# Altium PCB PCB1.PcbDoc
Units mm, origin at the board's own origin, x right, y up, seen from the top; angles counter-clockwise.
Board outline 152.4 x 101.6 mm, 2 copper layers (Top Layer, Bottom Layer); 44 components, 49 nets, 190 pads, 0 vias.
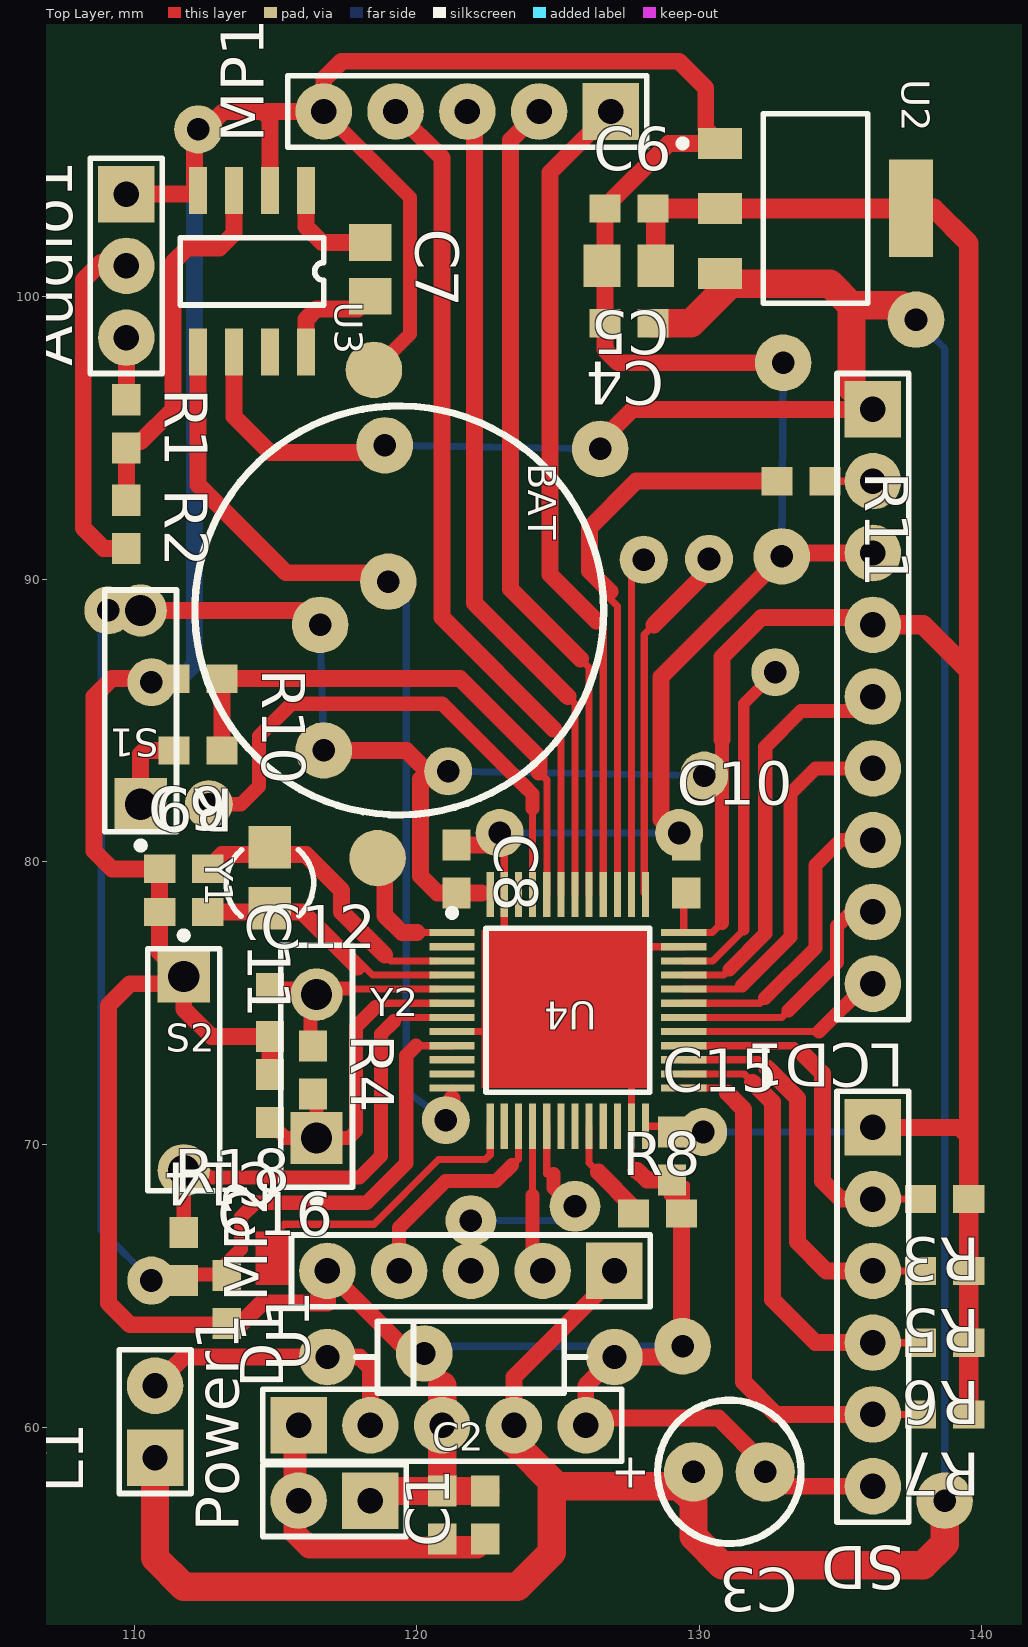
[diagram p0: Top Layer view]
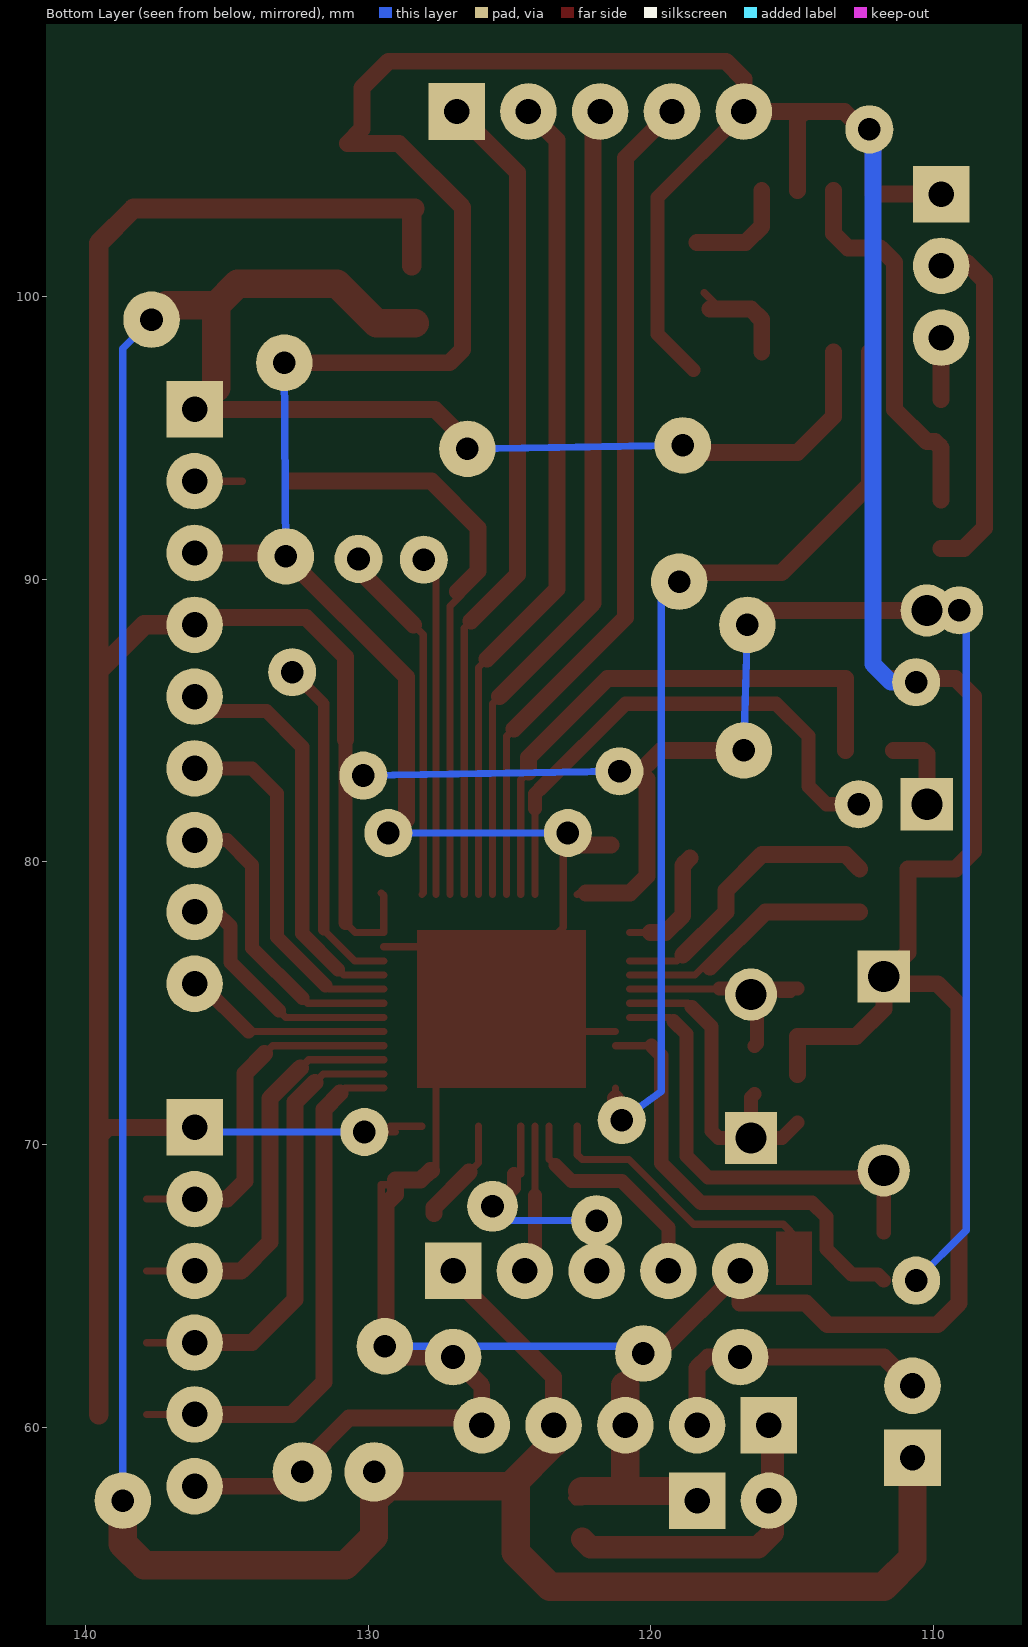
[diagram p1: Bottom Layer view, seen from below]

## Layer stack, top to bottom
Top Layer: signal copper 0.0356
Dielectric: dielectric 0.32, FR-4, Dk 4.8
Bottom Layer: signal copper 0.0356

## Board outline
25.4,25.4 177.8,25.4 177.8,127 25.4,127

## Design rules (kind name [scope] priority, off if disabled: settings)
Clearance [All] p1: gap=0.127
PolygonConnect [All] p1: connectstyle=Relief reliefconductorwidth=0.254 reliefentries=4 polygonreliefangle="90 Angle"
RoomDefinition Sheet1 [InComponentClass('Sheet1')] p1: confinementstyle=ConfineIn formatcopy=TRUE lockcomponents=FALSE outline 178.943,24.384 191.008,24.384 191.008,35.052 178.943,35.052
RoutingVias [All] p1: holewidth=0.711 width=1.27 viastyle="Through Hole" minholewidth=0.711 minwidth=1.27 maxholewidth=0.711 maxwidth=1.27
SilkscreenOverComponentPads [All] p1: minsilkscreentomaskgap=0.254
SolderMaskExpansion [All] p1: expansion=0.102
TestPointUsage [All] p1: valid=0 allowmultiple=FALSE
Testpoint [All] p1: side=15 testpointundercomponent=TRUE minsize=1.016 maxsize=2.54 preferedsize=1.524 minholesize=0 maxholesize=1.016 preferedholesize=0.813 testpointgrid=0.025 style=1023 order=0-112345678
Width [All] p1: maxlimit=1 minlimit=0.254 preferedwidth=0.254 minimp=50.000000 maximp=50.000000 favimp=50.000000
23 further rules are at their usual default settings.

## Components (designator, comment, footprint, x,y, rotation, side; value= is the part's Value field where it differs from the comment)
Audio1 "Header 3" HDR1X3 109.728,103.632 r270 top
BAT "UPS" BAT 119.38,88.9 r180 top
C1 "104" 1608[0603] 122.428,56.896 r90 top
C2 "104" 1608[0603] 120.904,56.896 r90 top (schematic designator C16)
C3 "470uF" RB.1/.2 131.064,58.42 r180 top (schematic designator C26)
C4 "104" 1608[0603] 127.508,99.06 r180 top
C5 "10uF" 2012[0805] 127.508,101.092 r180 top
C6 "104" 1608[0603] 127.508,103.124 r0 top
C7 "" 2012[0805] 118.364,100.965 r270 top
C8 "" 1608[0603] 121.412,79.756 r270 top
C9 "" 1608[0603] 111.76,79.756 r0 top
C10 "" 1608[0603] 129.54,79.756 r90 top
C11 "" 1608[0603] 111.76,78.232 r0 top
C12 "" 1608[0603] 114.808,74.676 r90 top
C14 "" 1608[0603] 114.808,71.628 r270 top
C15 "" 1608[0603] 129.032,69.596 r90 top
C16 "" 1608[0603] 113.284,64.516 r90 top
D1 "IN4937" DIODE-0.4 121.92,62.484 r180 top
L1 "100uH" HDR1X2 110.744,58.928 r90 top
LCD1 "LCD13164" HDR1X9 136.144,96.012 r270 top
MP1 "Header 5" HDR1X5 126.873,106.553 r180 top
MP2 "Header 5" HDR1X5 127,65.532 r180 top
Power1 "Header 2" HDR1X2 118.364,57.404 r180 top
R1 "100K" 1608[0603] 109.728,95.504 r270 top
R2 "100K" 1608[0603] 109.728,91.948 r270 top
R3 "45K" 1608[0603] 138.684,68.072 r180 top
R4 "1M" 1608[0603] 116.332,72.644 r270 top
R5 "45K" 1608[0603] 138.684,65.532 r180 top
R6 "45K" 1608[0603] 138.684,62.992 r180 top
R7 "45K" 1608[0603] 138.684,60.452 r180 top
R8 "10K" 1608[0603] 128.524,67.564 r0 top
R9 "10K" 1608[0603] 112.268,83.947 r180 top
R10 "1M" 1608[0603] 112.268,86.487 r0 top
R11 "45K" 1608[0603] 133.604,93.472 r0 top
R18 "10K" 1608[0603] 111.76,66.04 r90 top
S1 "SW-PB" SPST-2#1 110.236,85.344 r90 top
S2 "SW-PB" SPST-2#1 111.76,72.644 r270 top (schematic designator S1)
SD "Header 6" HDR1X6 136.144,70.612 r270 top
U1 "LM2576S5.0" HDR1X5 115.824,60.071 r0 top (schematic designator U7)
U2 "REG1117-2.5" ZZ311 134.112,103.124 r270 top (schematic designator U6)
U3 "LM386M-1" "SOP-8 - duplicate" 116.078,98.044 r90 bottom (schematic designator U2)
U4 "STM32F103C8T6" mTQFP48 125.476,76.2 r0 top (schematic designator U6)
Y1 "32.768K" BCY-W2/D3.1 114.808,79.248 r180 top
Y2 "8MHz" SPST-2#2 116.459,72.771 r90 top

## Footprints (in the part's own frame and the unit in brackets; to place one, negate y for a bottom-side part, rotate by r counter-clockwise, add the part's x,y. Pads: shape width x height; smd on the part's side, far side on the other; paste and mask are expansions set on the pad)
1608[0603] [mm] "Chip Capacitor; Body 1.6 x 0.8 mm (LxW typ)"
  rect 1.1x1 smd: 1(-0.85,0) 2(0.85,0)
2012[0805] [mm] "Chip Resistor; Body 2.0 x 1.3 mm (LxW typ)"
  rect 1.3x1.5 smd: 1(-0.95,0) 2(0.95,0)
BAT [mm]
  round 2 smd: 1(0.762,8.763) 2(0.889,-8.509)
  silkscreen extent -7.24,-7.23 7.23,7.23
BCY-W2/D3.1 [mm] "Crystal, Thru-Hole; 2 Leads; Body 3.1 x 8.2 mm (Dia.xH)"
  rect 1.5x1.5 smd: 1(0,0.889) 2(0,-1.27)
  silkscreen extent -1.55,-1.19 1.55,1.17
DIODE-0.4 [mm] "Tunnel Diode - Dependent Source Model; 2 Leads"
  round 2 hole 0.85: 1(-5.08,0) 2(5.08,0)
  silkscreen extent -4.06,-1.27 4.06,1.27
HDR1X2 [mm] "Connector; Header; 2 Position"
  rect 2x2 hole 0.9: 1(0,0)
  round 2 hole 0.9: 2(2.54,0)
  silkscreen extent -1.27,-1.27 3.81,1.27
HDR1X3 [mm] "Connector; Header; 3 Position"
  rect 2x2 hole 0.9: 1(0,0)
  round 2 hole 0.9: 2(2.54,0) 3(5.08,0)
  silkscreen extent -1.27,-1.27 6.35,1.27
HDR1X5 [mm] "Connector; Header; 5 Position"
  rect 2x2 hole 0.9: 1(0,0)
  round 2 hole 0.9: 2(2.54,0) 3(5.08,0) 4(7.62,0) 5(10.16,0)
  silkscreen extent -1.27,-1.27 11.43,1.27
HDR1X6 [mm] "Connector; Header; 6 Position"
  rect 2x2 hole 0.9: 1(0,0)
  round 2 hole 0.9: 2(2.54,0) 3(5.08,0) 4(7.62,0) 5(10.16,0) 6(12.7,0)
  silkscreen extent -1.27,-1.27 13.97,1.27
HDR1X9 [mm] "Connector; Header; 9 Position"
  rect 2x2 hole 0.9: 1(0,0)
  round 2 hole 0.9: 2(2.54,0) 3(5.08,0) 4(7.62,0) 5(10.16,0) 6(12.7,0) 7(15.24,0) 8(17.78,0) 9(20.32,0)
  silkscreen extent -1.27,-1.27 21.59,1.27
mTQFP48 [mm] "5.8mm"
  rect 1.6x0.254 smd: 1(-4.223,1.3) 2(-4.223,0.8) 3(-4.223,0.3) 4(-4.223,-0.2) 5(-4.223,-0.7) 6(-4.223,-1.2) 7(-4.223,-1.7) 8(-4.223,-2.2) 9(-4.223,-2.7) 10(-4.223,-3.2) 11(-4.223,-3.7) 12(-4.223,-4.2) 25(3.977,-4.2) 26(3.977,-3.7) 27(3.977,-3.2) 28(3.977,-2.7) 29(3.977,-2.2) 30(3.977,-1.7) 31(3.977,-1.2) 32(3.977,-0.7) 33(3.977,-0.2) 34(3.977,0.3) 35(3.977,0.8) 36(3.977,1.3)
  rect 0.254x1.6 smd: 13(-2.873,-5.55) 14(-2.373,-5.55) 15(-1.873,-5.55) 16(-1.373,-5.55) 17(-0.873,-5.55) 18(-0.373,-5.55) 19(0.127,-5.55) 20(0.627,-5.55) 21(1.127,-5.55) 22(1.627,-5.55) 23(2.127,-5.55) 24(2.627,-5.55) 37(2.627,2.65) 38(2.127,2.65) 39(1.627,2.65) 40(1.127,2.65) 41(0.627,2.65) 42(0.127,2.65) 43(-0.373,2.65) 44(-0.873,2.65) 45(-1.373,2.65) 46(-1.873,2.65) 47(-2.373,2.65) 48(-2.873,2.65)
  silkscreen extent -4.35,-4.35 2.78,2.12
RB.1/.2 [mm]
  round 2.1 hole 0.8: 1(1.27,0) 2(-1.27,0)
  silkscreen extent -2.54,-2.54 2.54,2.54
"SOP-8 - duplicate" [mil] "SOP-8"
  rect 65x25 smd far side: 1(225,0) 2(225,-50) 3(225,-100) 4(225,-150) 5(0,-150) 6(0,-100) 7(0,-50) 8(0,0)
SPST-2#1 [mm] "Circuit Breaker; 2 Leads"
  rect 1.85x1.85 hole 1.1: 1(-3.302,0)
  round 1.85 hole 1.1: 2(3.556,0)
  silkscreen extent -4.89,-1.27 4.28,1.27
SPST-2#2 [mm] "Circuit Breaker; 2 Leads"
  rect 1.85x1.85 hole 1.1: 1(-2.54,0)
  round 1.85 hole 1.1: 2(2.54,0)
  silkscreen extent -4.89,-1.27 4.28,1.27
ZZ311 [mm] "SOT-223/SC-73; 4 Leads; Body 6.7 x 7.3 mm, inc. leads (LxW max)"
  rect 1.1x1.55 smd: 1(-2.3,-3.375) 2(0,-3.375) 3(2.3,-3.375)
  rect 3.45x1.55 smd: 4(0,3.375)
  silkscreen extent -3.35,-4.82 3.35,1.85

## Part data
Audio1: "Header, 3-Pin"
C1 C2 C4 C5 C6 C8 C9 C10 C11 C12 C14 C15 C16: library part Cap, "Capacitor"
C3: library part "CAPACITOR POL", "Capacitor"
C7: library part "Cap Pol1", "Polarized Capacitor (Radial)"
D1: library part "Diode 1N4007", "1 Amp General Purpose Rectifier"
L1: library part INDUCTOR2
MP1 MP2: "Header, 5-Pin"
Power1: "Header, 2-Pin"
R1 R2 R3 R4 R5 R6 R7 R8 R9 R10 R11 R18: library part Res2, "Resistor"
S1 S2: "Switch"
SD: "Header, 6-Pin"
U1: "Simple Switcher 3A Step Down Voltage Regulator"
U2: library part REG1117-3.3, "800mA and 1A Low Dropout Positive Regulator 2.85V, 3.3V, 5V, and Adjustable"
U3: library part TDA2822
U4: library part VS1003
Y1 Y2: library part XTAL, "Crystal Oscillator"

## Free pads (board coordinates)
  round 1.8 hole 0.8: 0(121.92,67.31) 1(125.603,67.818)
  round 2 hole 0.8: 3(118.872,94.742) 4(126.492,94.615) 5(118.999,89.916) 7(138.684,57.404) 8(137.668,99.187) 9(116.713,83.947) 10(116.586,88.392) 11(120.269,62.611) 12(129.413,62.865) 13(132.969,97.663) 14(132.918,90.813)
  round 1.7 hole 0.8: 6(121.031,70.866) 15(130.136,70.446) 16(110.617,65.19) 17(109.093,88.9) 18(121.112,83.208) 19(130.175,83.058) 20(122.936,81.026) 21(129.286,81.026) 22(110.617,86.36) 23(112.268,105.918) 24(132.691,86.717) 25(130.345,90.721) 26(128.035,90.697) 27(112.649,82.042)

## Nets (pads, with @x,y where several pads share a name; then routed paths per layer and width w, separated by ;. In a path a pad name is that pad's centre, name@x,y a point inside that pad or via, vN(x,y) a via of type N, cw(c..) or ccw(c..) an arc to the next point about the centre after c; other vN are vias at no path point)
5V: C3.1 C4.1 L1.1 LCD1.1 MP2.1 pad.3 pad.4 pad.7 pad.8 U1.4 U2.3 U3.6 | length 133.1
  Top Layer w0.254: LCD1.1@135.382,96.012 LCD1.1@135.382,96.774 ; LCD1.1@135.636,96.52 LCD1.1
  Top Layer w0.6: U3.6 113.538,95.758 114.808,94.488 118.872,94.488 pad.3 ; U1.4 123.444,61.782 127,65.338 MP2.1 ; pad.4 127,95.377 127.635,96.012 135.382,96.012 LCD1.1
  Top Layer w1: L1.1 110.744,55.372 111.76,54.356 123.571,54.356 124.782,55.567 124.782,58.098 ; U1.4 123.444,59.436 124.968,57.912 129.286,57.912 C3.1@129.794,57.404 ; C4.1 129.707,99.06 131.104,100.457 134.62,100.457 135.382,99.695 ; C3.1 129.794,56.134 130.81,55.118 137.922,55.118 138.684,55.88 pad.7 ; LCD1.1@135.382,96.774 135.382,99.695 ; pad.8 137.16,99.695 135.382,99.695
  Bottom Layer w0.254: pad.3 pad.4 ; pad.8@137.16,99.187 pad.8 138.684,98.171 pad.7
15V: C1.1 C2.1 Power1.2 U1.1 | length 11.1
  Top Layer w0.254: Power1.2@115.697,56.642 Power1.2@115.824,56.515
  Top Layer w0.8: U1.1 115.697,59.944 115.697,56.642 115.697,56.261 116.205,55.753 122.135,55.753 C1.1
BOOT0: R9.1 R10.2 U4.44 | length 19.9
  Top Layer w0.254: 124.331,83.187 124.607,82.911 124.607,78.854 U4.44
  Top Layer w0.6: R9.1 R10.2 121.539,86.487 124.331,83.695 124.331,83.187
DGND: Audio1.1 BAT.2 C1.2 C2.2 C3.2 C4.2 C5.2 C6.1 C8.1 C9.1 C10.2 C11.1 C12.1 C14.1 C15.1 C16.1 D1.1 LCD1.3 MP1.5 MP2.5 pad.11 pad.12 pad.13 pad.14 pad.20 pad.21 pad.22 pad.23 Power1.1 R8.2 R10.1 S2.1 SD.6 U1.3 U1.5 U2.1 U3.2 U3.4 U4.8 U4.23 U4.35 U4.47 | length 254.5
  Top Layer w0.254: Power1.1@118.977,57.509 C2.2@120.667,57.509 ; pad.11@120.269,62.103 120.904,61.468 ; U4.8 122.936,74 ; C1.2@122.428,57.365 122.682,57.365 C1.2@122.809,57.492 ; pad.20@123.317,81.407 123.317,80.899 123.024,80.606 122.721,80.606 123.103,80.224 U4.47 123.103,77.684 123.787,77 ; 123.787,76.289 123.787,77 ; 127.285,73.375 127.603,73.057 U4.23 127.603,69.247 127.762,69.088 128.27,68.58 129.032,68.58 129.54,68.58 129.54,67.73 R8.2 129.374,63.207 128.651,62.484 D1.1 125.984,61.468 U1.5 126.238,60.325 130.429,60.325 C3.2 132.842,57.912 SD.6 ; U4.35 123.787,77
  Top Layer w0.5: MP1.5 119.761,103.505 119.761,98.679 BAT.2
  Top Layer w0.6: Audio1.1 112.141,103.632 112.141,105.537 113.157,106.553 114.554,106.553 ; R10.1 109.22,86.487 108.585,85.852 108.585,80.391 109.22,79.756 C9.1 C11.1 110.91,76.796 S2.1 111.76,74.803 112.737,73.826 C12.1 C14.1 ; S2.1@111.506,75.692 109.855,75.692 109.093,74.93 109.093,64.389 109.855,63.627 113.753,63.627 114.3,64.174 114.515,64.389 116.84,64.389 MP2.5 119.761,62.611 pad.11 ; U3.2 114.808,106.299 114.554,106.553 ; C8.1 122.516,80.606 pad.20 ; 127.762,69.088 127.804,69.088 128.146,68.746 C15.1 129.032,68.58 129.032,68.238 129.374,67.896 129.374,62.904 pad.12 129.032,62.484 D1.1 125.984,61.468 U1.5 126.238,60.325 130.683,60.325 133.096,57.912 SD.6 ; C10.2 128.651,81.495 128.651,86.545 pad.14 133.038,90.932 LCD1.3 ; pad.13 131.064,97.663 127.127,97.663 126.658,98.132 C4.2 C6.1 126.658,103.163 128.919,105.424 U2.1 130.229,105.932 130.229,107.388 129.286,108.331 117.348,108.331 116.713,107.696 MP1.5 114.554,106.553
  Top Layer w1: Power1.1 118.706,57.746 C2.2 ; 120.904,61.468 U1.3 C2.2 ; C1.2 C2.2 ; 122.936,74 123.698,74 ; 124.333,74 123.698,74 ; 127.285,73.375 127.285,76.231 127.635,76.581 124.079,76.581 123.787,76.289 123.698,76.2 123.698,74
  Bottom Layer w0.254: pad.11 120.523,62.865 pad.12 ; pad.20 pad.21 ; pad.14 pad.13
  Bottom Layer w0.6: pad.22 111.506,86.36 112.141,86.995 112.141,105.791 pad.23
LCDCS: LCD1.7 U4.31 | length 10.8
  Top Layer w0.254: U4.31 132.15,75 132.331,75.181
  Top Layer w0.5: 132.331,75.181 134.112,76.962 134.112,79.883 135.001,80.772 LCD1.7
LCDRS: LCD1.6 U4.32 | length 12.9
  Top Layer w0.254: U4.32 131.38,75.5 131.508,75.629
  Top Layer w0.5: 131.508,75.629 133.223,77.343 133.223,82.423 134.112,83.312 LCD1.6
LCDRST: LCD1.5 U4.33 | length 14.6
  Top Layer w0.254: U4.33 130.864,76 131.064,76.2
  Top Layer w0.5: 131.064,76.2 132.334,77.47 132.334,84.074 133.604,85.344 135.636,85.344 LCD1.5
LCDSCK: LCD1.8 U4.30 | length 9
  Top Layer w0.254: U4.30 132.92,74.5 133.16,74.739
  Top Layer w0.5: 133.16,74.739 134.874,76.454 134.874,77.724 135.382,78.232 LCD1.8
LCDSDA: LCD1.9 U4.29 | length 7.4
  Top Layer w0.254: U4.29 134.239,74
  Top Layer w0.5: 134.239,74 135.931,75.692 LCD1.9
MP3_DREQ: MP1.2 U4.41 | length 29.3
  Top Layer w0.254: 125.793,87.185 126.103,86.876 U4.41
  Top Layer w0.6: MP1.2 123.317,105.537 123.317,89.662 125.793,87.185
MP3_MISO: MP2.2 U4.16 | length 5.3
  Top Layer w0.254: 124.103,68.199 124.103,68.494 124.099,68.498 124.099,70.646 U4.16
  Top Layer w0.5: 124.103,68.199 124.103,66.294 124.46,65.937 MP2.2
MP3_MOSI: MP2.3 pad.0 pad.1 U4.17 | length 8.9
  Top Layer w0.254: MP2.3 pad.0 ; 124.603,68.961 U4.17
  Top Layer w0.5: 124.841,68.961 124.841,68.469 125.492,67.818 pad.1
  Bottom Layer w0.254: pad.0 125.095,67.31 pad.1
MP3_RST: MP1.1 U4.40 | length 29.4
  Top Layer w0.254: 126.363,88.521 126.603,88.281 U4.40
  Top Layer w0.6: 126.363,88.521 124.714,90.17 124.714,104.394 MP1.1
MP3_SCLK: MP2.4 U4.15 | length 7.9
  Top Layer w0.254: 123.38,69.278 123.571,69.469 ; 123.603,69.469 U4.15
  Top Layer w0.5: MP2.4 119.38,67.056 121.031,68.707 122.809,68.707 123.38,69.278
MP3_XCS: MP1.4 U4.43 | length 30.1
  Top Layer w0.254: 124.841,84.709 125.103,84.447 U4.43
  Top Layer w0.6: MP1.4 120.904,104.902 120.904,88.646 124.841,84.709
MP3_XDCS: MP1.3 U4.42 | length 29.3
  Top Layer w0.254: 125.349,85.852 125.603,85.598 U4.42
  Top Layer w0.6: MP1.3 122.047,106.299 122.047,89.154 125.349,85.852
NetAudio1_2: Audio1.2 R2.2 | length 12.4
  Top Layer w0.6: R2.2 108.927,91.098 108.204,91.821 108.204,100.584 108.839,101.219 109.601,101.219 Audio1.2
NetAudio1_3: Audio1.3 R1.1 | length 2.2
  Top Layer w0.6: R1.1 Audio1.3
NetC7_1: C7.1 U3.1 | length 3.8
  Top Layer w0.6: U3.1 116.078,102.489 116.652,101.915 C7.1
NetC7_2: C7.2 U3.8 | length 3.7
  Top Layer w0.254: C7.2@117.727,99.758 C7.2@118.11,100.142
  Top Layer w0.6: U3.8 116.078,99.187 116.459,99.568 C7.2@117.917,99.568
NetC9_2: C9.2 U4.3 Y1.2 | length 10.4
  Top Layer w0.254: 118.872,76.708 119.08,76.5 U4.3@120.745,76.5
  Top Layer w0.6: C9.2 113.118,80.264 116.078,80.264 117.348,78.994 117.348,78.232 118.872,76.708
NetC11_2: C11.2 U4.4 Y1.1 | length 9.2
  Top Layer w0.254: C11.2 C11.2@112.737,78.359 ; 118.031,76.406 118.437,76 U4.4@120.745,76
  Top Layer w0.6: C11.2 115.951,78.232 117.904,76.279
NetC12_2: C12.2 R4.1 U4.5 Y2.2 | length 8.5
  Top Layer w0.254: C12.2 115.023,75.311 115.443,75.311 ; 117.576,75.5 U4.5@120.745,75.5
  Top Layer w0.5: C12.2 117.576,75.526 ; Y2.2@116.244,75.311 116.244,73.582 R4.1
NetC14_2: C14.2 R4.2 U4.6 Y2.1 | length 11.9
  Top Layer w0.254: 118.554,74.867 118.688,75 U4.6@120.745,75
  Top Layer w0.5: C14.2 115.355,70.231 Y2.1 ; R4.2 116.459,71.667 Y2.1 ; 118.554,74.867 117.856,74.168 117.856,70.485 117.602,70.231 Y2.1
NetD1_2: D1.2 L1.2 U1.2 | length 10.2
  Top Layer w0.6: L1.2 111.76,62.484 D1.2 117.983,62.484 118.364,62.103 U1.2
NetLCD1_2: LCD1.2 R11.2 | length 1.7
  Top Layer w0.254: R11.2 LCD1.2
NetR1_2: R1.2 R2.1 U3.3 | length 13.4
  Top Layer w0.6: R2.1 R1.2 109.943,94.869 110.236,94.869 111.379,96.012 111.379,101.219 111.887,101.727 113.03,101.727 113.538,102.235 U3.3
NetR8_1: R8.1 U4.20 | length 3.7
  Top Layer w0.254: U4.20 126.103,69.35 126.428,69.025
  Top Layer w0.6: 126.428,69.025 127.674,67.779 R8.1
NetR9_2: R9.2 S1.1 | length 3
  Top Layer w0.6: S1.1 110.236,83.82 110.363,83.947 R9.2
PA0: U4.10
PA1: U4.11
PA2: pad.5 pad.6 U3.5 U4.12 | length 34.9
  Top Layer w0.254: pad.6@121.253,71.628 U4.12
  Top Layer w0.6: U3.5 112.268,93.345 115.379,90.233 118.681,90.233 pad.5 ; pad.6 121.253,70.453 pad.6@121.253,71.628
  Bottom Layer w0.254: pad.5 119.634,89.281 119.634,71.882 pad.6
PA3: U4.13 | length 11
  Top Layer w0.254: 114.808,65.659 114.808,66.675 115.316,67.183 118.491,67.183 120.777,69.469 122.428,69.469 122.603,69.644 U4.13
PA4: U4.14
PA13: pad.24 U4.34 | length 12.7
  Top Layer w0.254: U4.34 130.475,76.5 131.572,77.597
  Top Layer w0.4: 131.572,77.597 131.572,85.598 pad.24@133.096,87.122
PA14: pad.25 U4.37 | length 13.2
  Top Layer w0.254: U4.37 128.055,78.898 128.055,88.05 128.397,88.392 ; pad.25 pad.25@130.619,90.995
  Top Layer w0.6: 128.397,88.392 130.345,90.34 pad.25
PA15: pad.26 U4.38 | length 12.5
  Top Layer w0.254: U4.38 127.603,90.265 pad.26@128.397,91.059
PB3: R11.1 U4.39 | length 20.6
  Top Layer w0.254: 126.712,89.442 127.103,89.051 U4.39
  Top Layer w0.6: 126.839,89.569 126.111,90.297 126.111,91.821 127.762,93.472 R11.1
PB8: pad.27 U4.45 | length 19
  Top Layer w0.254: pad.27@112.522,82.042 pad.27 ; U4.45 124.103,81.891
  Top Layer w0.5: pad.27 113.792,82.042 114.427,82.677 114.427,84.455 115.57,85.598 120.904,85.598 123.825,82.677 124.103,82.399 124.103,81.891
PB9: U4.46
PB10: U4.21
PB11: U4.22
PB12: R7.2 SD.5 U4.25 | length 18.8
  Top Layer w0.254: U4.25 130.819,72 130.996,71.823 ; SD.5 R7.2
  Top Layer w0.6: 130.996,71.823 131.572,71.247 131.572,61.595 132.715,60.452 SD.5
PB13: R6.2 SD.4 U4.26 | length 16.4
  Top Layer w0.254: U4.26 131.589,72.5 131.884,72.205 ; SD.4 R6.2
  Top Layer w0.6: 131.884,72.205 132.588,71.501 132.588,64.516 134.112,62.992 SD.4
PB14: R5.2 SD.3 U4.27 | length 14.5
  Top Layer w0.254: U4.27 132.105,73 132.398,72.707 ; SD.3 R5.2
  Top Layer w0.6: 132.404,72.714 133.477,71.64 133.477,66.548 134.493,65.532 SD.3
PB15: R3.2 SD.2 U4.28 | length 12.9
  Top Layer w0.254: U4.28 133.383,73.5 133.667,73.215 ; SD.2 R3.2
  Top Layer w0.6: 133.667,73.215 134.366,72.517 134.366,68.707 135.001,68.072 SD.2
RESET: R18.2 S2.2 U4.7 | length 16.2
  Top Layer w0.254: 119.194,74.363 119.331,74.5 U4.7@120.745,74.5
  Top Layer w0.5: R18.2 S2.2 112.395,69.088 112.649,68.834 117.983,68.834 118.745,69.596 118.745,73.914 119.194,74.363
VBAT: BAT.1 U4.1 | length 4.3
  Top Layer w0.254: 120.015,77.5 U4.1@120.745,77.5
  Top Layer w0.6: BAT.1 118.872,79.883 118.872,78.105 119.477,77.5 120.015,77.5
VCC3.3: C5.1 C6.2 C8.2 C10.1 C15.2 C16.2 LCD1.4 pad.9 pad.10 pad.15 pad.16 pad.17 pad.18 pad.19 R3.1 R5.1 R6.1 R7.1 R18.1 S1.2 SD.1 U2.2 U2.4 U4.9 U4.24 U4.36 U4.48 | length 161.4
  Top Layer w0.254: 119.982,73.5 U4.9 ; pad.18@120.65,82.931 pad.18 ; 122.301,78.906 122.547,78.906 U4.48 ; U4.24 C15.2@129.236,70.65 ; C15.2 pad.15 ; C10.1 129.453,78.819 U4.36 130.459,77.5 130.81,77.851
  Top Layer w0.5: R18.1 111.975,65.405 112.893,65.405 113.792,66.304 113.792,67.437 114.3,67.945 118.237,67.945 119.634,69.342 119.634,73.152 119.982,73.5 ; 130.81,77.851 130.81,84.328
  Top Layer w0.6: S1.2 116.078,88.9 pad.10 ; pad.9 119.634,83.947 120.65,82.931 120.142,82.931 120.142,79.502 120.738,78.906 C8.2 122.301,78.906 ; 130.81,84.328 130.81,87.249 132.207,88.646 135.89,88.646 LCD1.4 ; SD.1 139.192,70.612 139.534,70.27
  Top Layer w0.7: C5.1 128.458,103.024 C6.2 U2.2 U2.4 138.303,103.124 139.534,101.893 139.534,86.78 ; LCD1.4 137.922,88.392 139.534,86.78 ; R7.1 R6.1 R5.1 R3.1 139.534,70.27 139.534,86.526 139.534,86.78
  Bottom Layer w0.254: pad.17@108.839,89.154 108.839,66.968 pad.16 ; pad.10 pad.9 ; pad.18 pad.19 ; pad.15 SD.1@135.978,70.446
pads on no net: U3.7 U4.2 U4.18 U4.19

## Other copper
Top Layer:
  rectangle net PA3: 114.3,65.024 115.57,66.929
  rectangle net DGND: 122.301,72.009 128.27,77.597

## Text inside footprints (layer, text, board x,y; h text height)
C3: Top Overlay "+" at 128.27,58.928 h1.22 r180